# Altium PCB RX.PcbDoc
Units mil, origin at the board's own origin, x right, y up, seen from the top; angles counter-clockwise.
Board outline 2185.03 x 2115.03 mil, 2 copper layers (Top Layer, Bottom Layer); 9 components, 16 nets, 61 pads, 0 vias.
Unrouted connection lines stored in the file: 1.
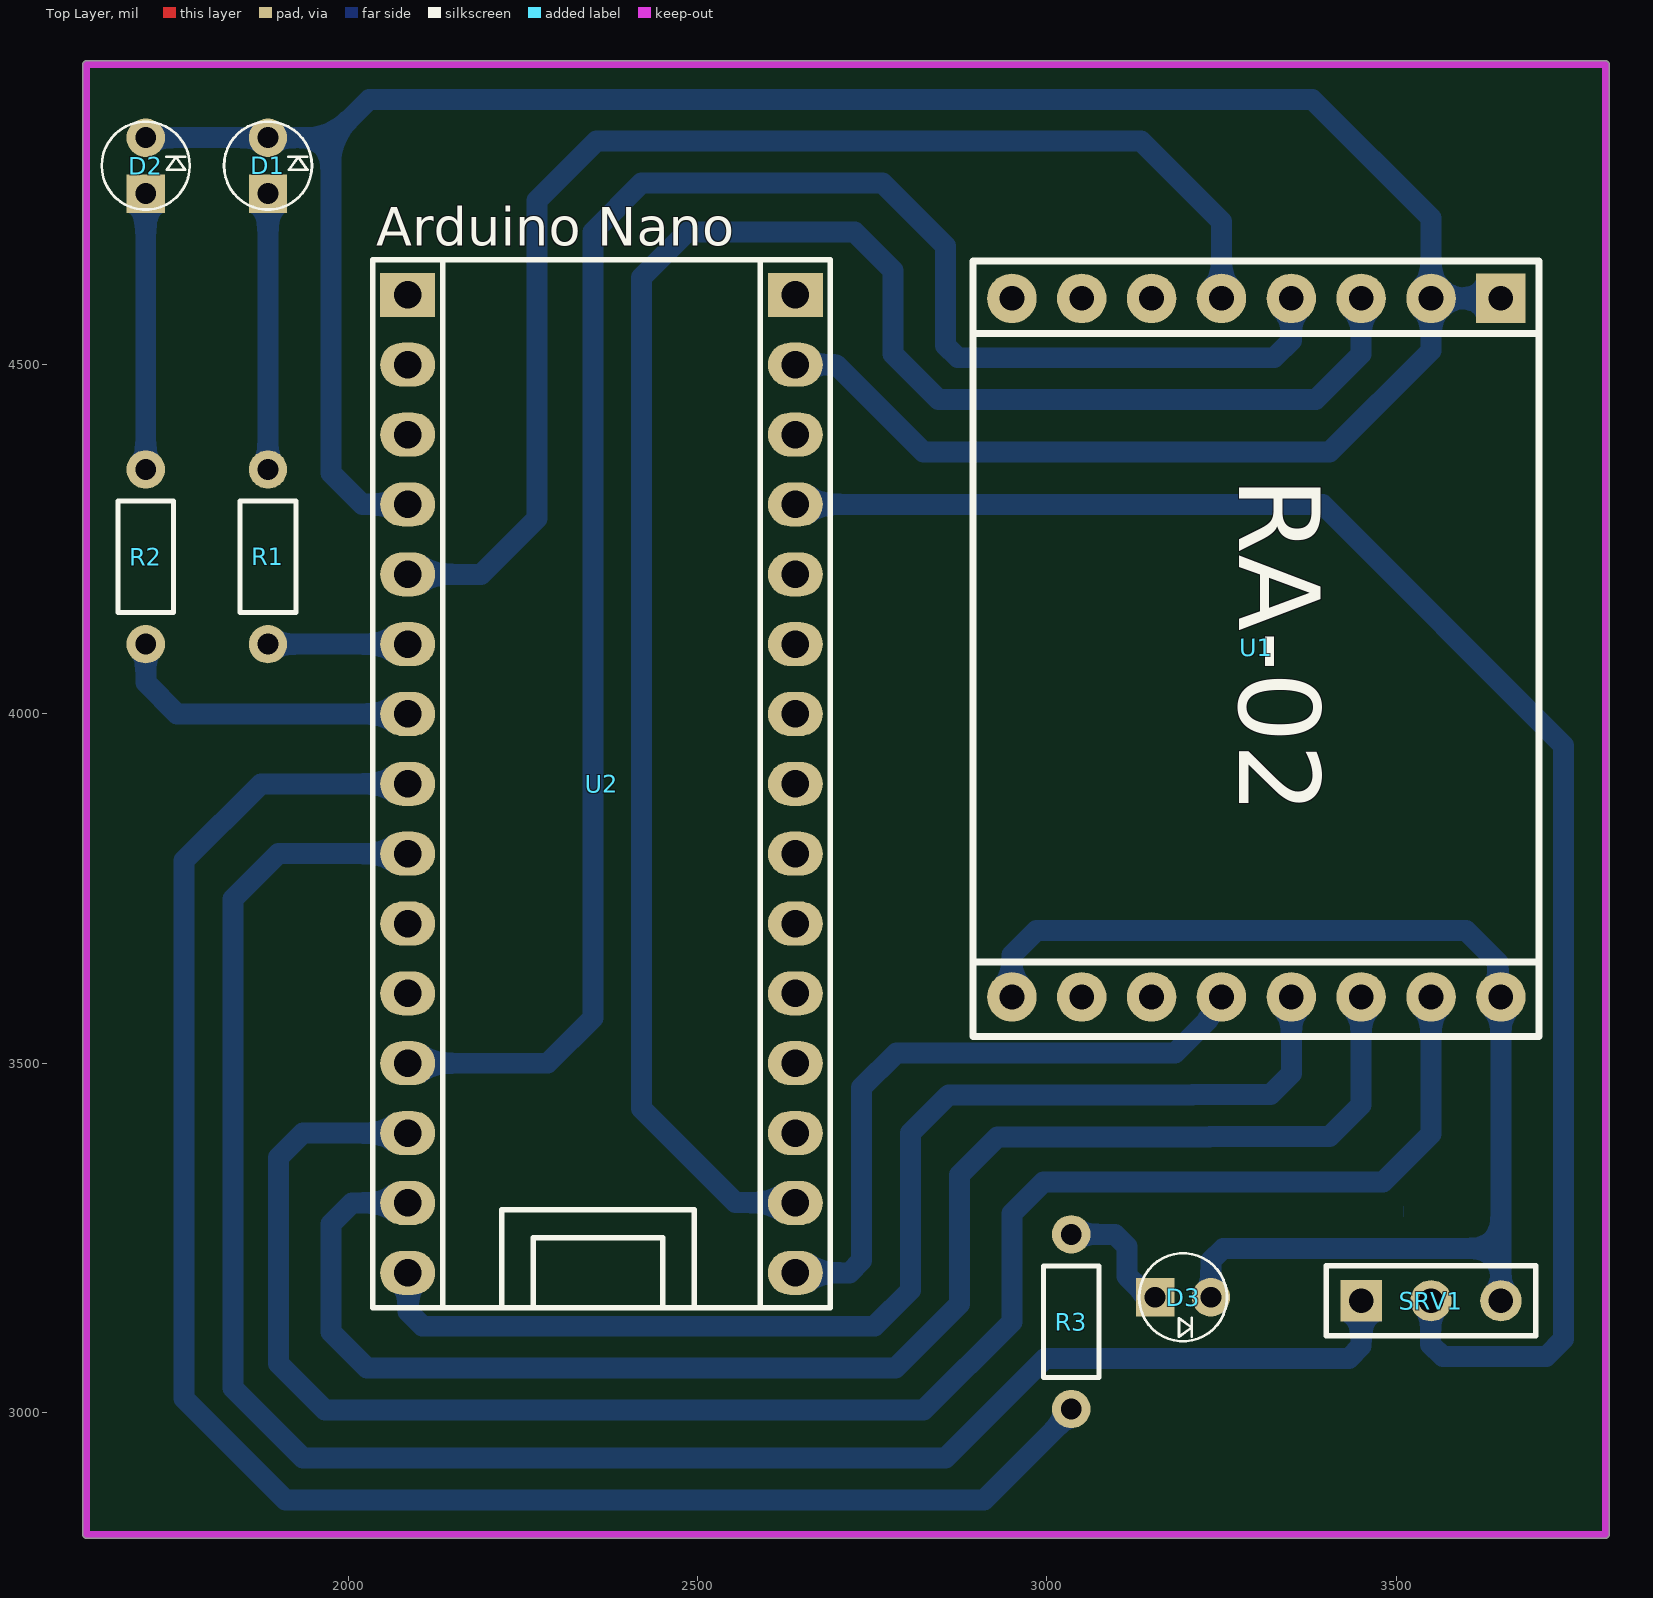
[diagram p0: Top Layer view]
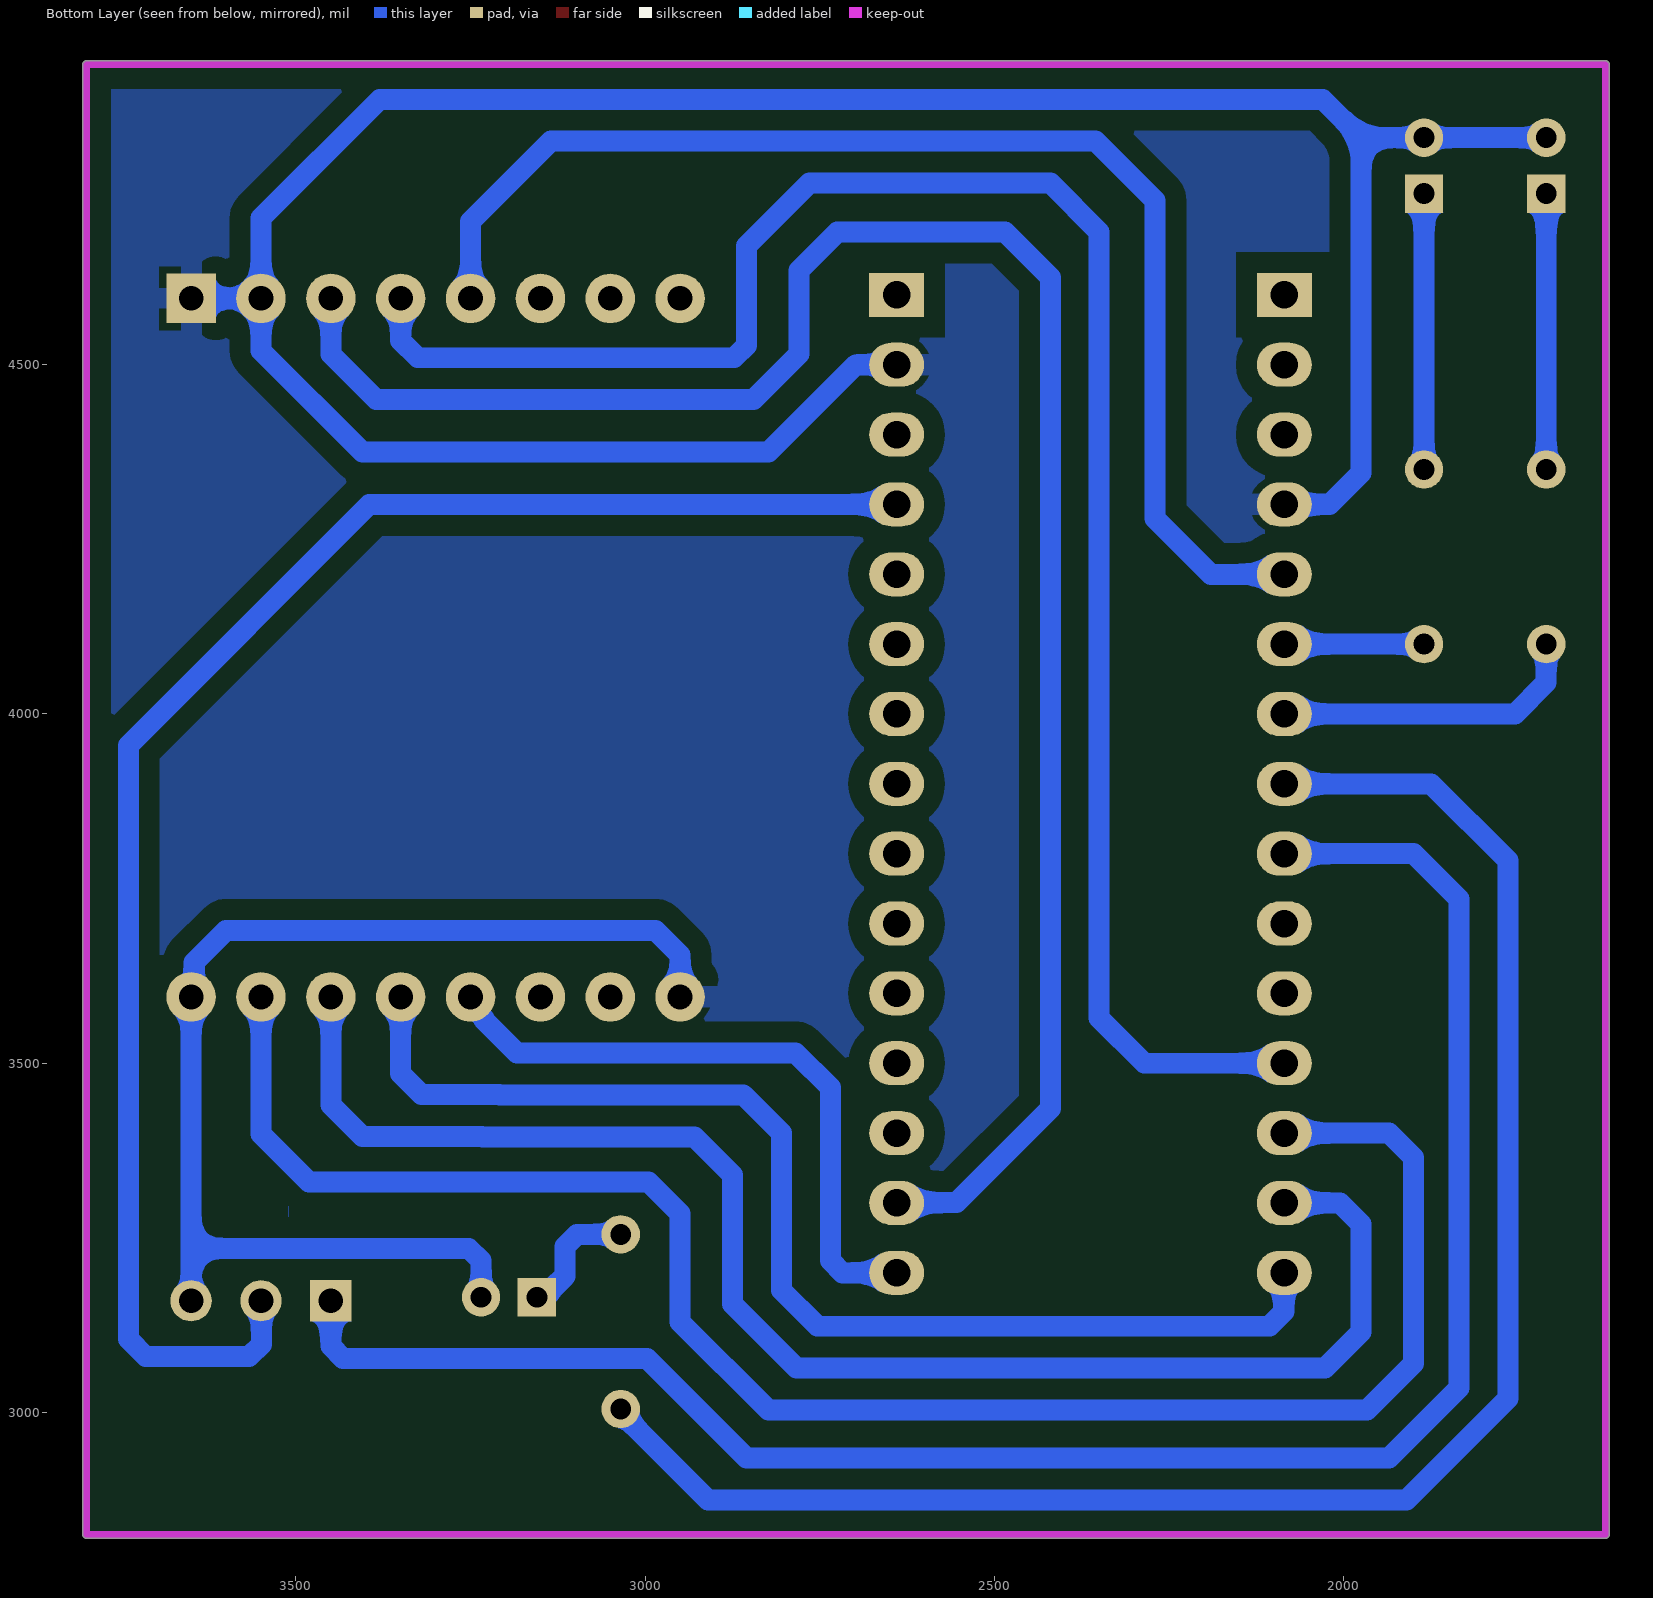
[diagram p1: Bottom Layer view, seen from below]
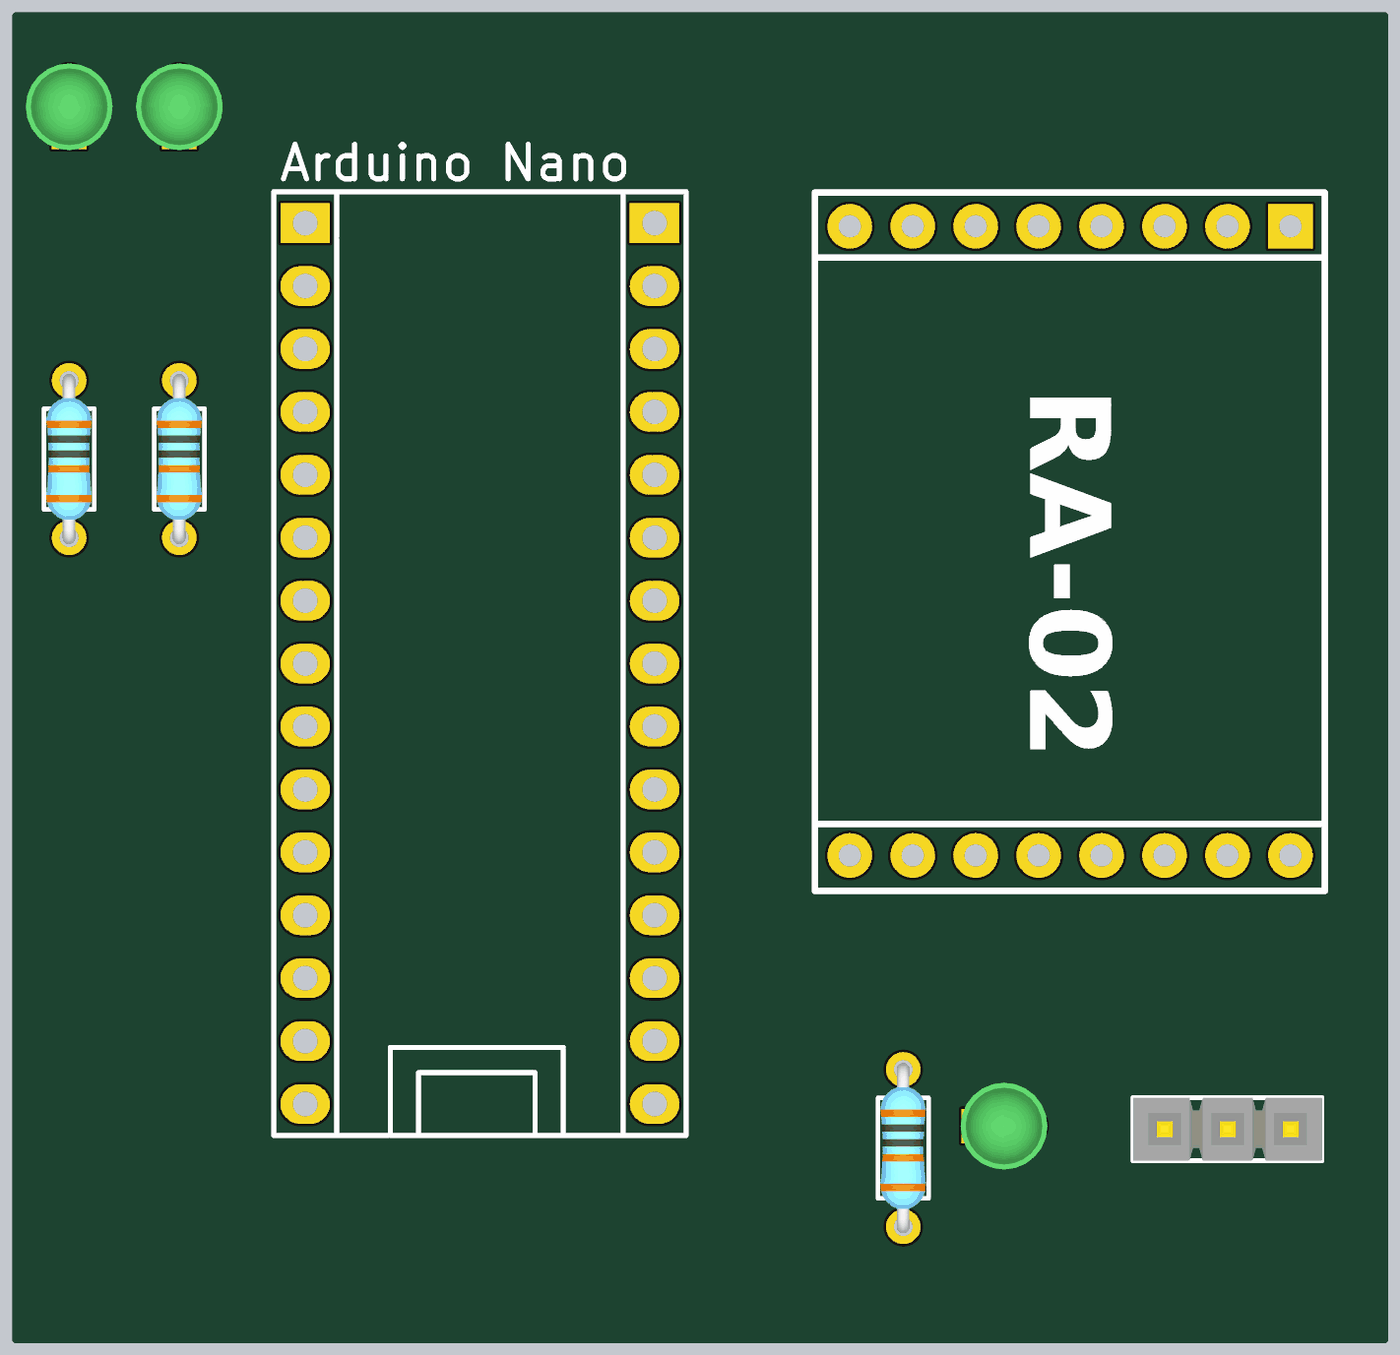
[diagram p2: 3D render of the assembled board from above, using the file's embedded part models]

## Layer stack, top to bottom
Top Solder: solder mask 0.4, Solder Resist, Dk 3.5
Top Layer: signal copper 1.4
Dielectric 1: dielectric 12.6, FR-4, Dk 4.8
Bottom Layer: signal copper 1.4
Bottom Solder: solder mask 0.4, Solder Resist, Dk 3.5

## Board outline
1625,2819.99 cw(c1625,2825) 1619.98,2825 1619.98,4930 cw(c1625,4930) 1625,4935.02 3800,4935.02 cw(c3800,4930) 3805.01,4930 3805.01,2825 cw(c3800,2825) 3800,2819.99

## Design rules (kind name [scope] priority, off if disabled: settings)
Clearance [All] p1: gap=30 ignorepadtopadclearanceinfootprint=FALSE except(10: THPad-THPad)
PolygonConnect [All] p1: connectstyle=Relief reliefconductorwidth=30 reliefentries=4 polygonreliefangle="90 Angle" airgapwidth=10
RoutingVias [All] p1: holewidth=28 width=50 viastyle="Through Hole" minholewidth=28 minwidth=50 maxholewidth=28 maxwidth=50
SilkToSolderMaskClearance [IsPad] p1: minsilkscreentomaskgap=0 clearancetoexposedcopper=TRUE
SolderMaskExpansion [All] p1: expansion=4 istentingtop=FALSE
Width [All] p1: maxlimit=100 minlimit=10 preferedwidth=30 minimp=50.000000 maximp=50.000000 favimp=50.000000
29 further rules are at their usual default settings.

## Components (designator, comment, footprint, x,y, rotation, side; value= is the part's Value field where it differs from the comment)
D1 "LED" LED3mm_GRN 1885,4785 r90 top
D2 "LED" LED3mm_GRN 1710,4785 r90 top
D3 "LED" LED3mm_GRN 3195,3165 r0 top
R1 "220R" RES-(1/4) 1885,4225 r270 top
R2 "220R" RES-(1/4) 1710,4225 r270 top
R3 "220R" RES-(1/4) 3035,3130 r270 top
SRV1 "Header 3" HDR1X3 3450,3160 r0 top
U1 "RA-02" RA-02 3650,4595 r270 top
U2 "Arduino Nano" Arduino_Nano328 2362.5,3900 r90 top

## Footprints (in the part's own frame and the unit in brackets; to place one, negate y for a bottom-side part, rotate by r counter-clockwise, add the part's x,y. Pads: shape width x height; smd on the part's side, far side on the other; paste and mask are expansions set on the pad)
Arduino_Nano328 [mm]
  rect 1.6x2 hole 1: 1(17.78,7.049) 30(17.78,-7.048)
  oval 1.6x2 hole 1: 2(15.24,7.049) 3(12.7,7.049) 4(10.16,7.048) 5(7.62,7.048) 6(5.08,7.048) 7(2.54,7.048) 8(0,7.048) 9(-2.54,7.048) 10(-5.08,7.048) 11(-7.62,7.048) 12(-10.16,7.048) 13(-12.7,7.048) 14(-15.24,7.048) 15(-17.78,7.048) 16(-17.78,-7.049) 17(-15.24,-7.049) 18(-12.7,-7.049) 19(-10.16,-7.048) 20(-7.62,-7.048) 21(-5.08,-7.048) 22(-2.54,-7.048) 23(0,-7.048) 24(2.54,-7.048) 25(5.08,-7.048) 26(7.62,-7.048) 27(10.16,-7.048) 28(12.7,-7.048) 29(15.24,-7.048)
  silkscreen extent -19.05,-8.32 19.05,8.32
HDR1X3 [mm] "Connector; Header; 3 Position"
  rect 1.5x1.5 hole 0.9: 1(0,0)
  round 1.5 hole 0.9: 2(2.54,0) 3(5.08,0)
  silkscreen extent -1.27,-1.27 6.35,1.27, body extent -1.26,-1.27 6.36,1.27, height 8.38
LED3mm_GRN [mil]
  rect 55x55 hole 30: 1(-40,0)
  round 55 hole 30: 2(40,0)
  silkscreen extent -63,-63 63,63, body extent -69,-69 69,69, height 154
RA-02 [mm]
  rect 1.8x1.8 hole 0.9: 1(0,0)
  round 1.8 hole 0.9: 2(0,-2.54) 3(0,-5.08) 4(0,-7.62) 5(0,-10.16) 6(0,-12.7) 7(0,-15.24) 8(0,-17.78) 9(25.4,-17.78) 10(25.4,-15.24) 11(25.4,-12.7) 12(25.4,-10.16) 13(25.4,-7.62) 14(25.4,-5.08) 15(25.4,-2.54) 16(25.4,0)
  silkscreen extent -1.36,-19.19 26.83,1.39
RES-(1/4) [mil]
  round 55 hole 30: 1(-125,0) 2(125,0)
  silkscreen extent -80,-40 80,40, body extent -135,-36 135,36, height 115

## Part data
D1 D2 D3: library part "LED 3MM", "Light Emitting Diode", Designer="Ali Hafizi"
R1 R2 R3: library part "RES DIP PACKAGE", "TOTAL DIP RESISTOR PACK", Designer="Ali Hafizi"
SRV1: "Header, 3-Pin", LatestRevisionDate=17-Jul-2002, LatestRevisionNote="Re-released for DXP Platform.", Publisher="Altium Limited"
U2: "Arduino Nano 328"

## Nets (pads, with @x,y where several pads share a name; then routed paths per layer and width w, separated by ;. In a path a pad name is that pad's centre, name@x,y a point inside that pad or via, vN(x,y) a via of type N, cw(c..) or ccw(c..) an arc to the next point about the centre after c; other vN are vias at no path point)
+3V3: U1.3 U2.17 | length 2799.4
  Bottom Layer w30: U2.17 2639.47,3300.53 2554.47,3300.53 2420,3435 2420,4625 2485,4690 2725,4690 2780,4635 2780,4515.15 2845.15,4450 3385,4450 3450,4515 U1.3
+5V: SRV1.2 U2.27 | length 2363.8
  Bottom Layer w30: U2.27 3395,4300 3740,3955 3740,3105 3715,3080 3567.01,3080 3549.44,3097.57 3549.44,3159.44 SRV1.2
D0: U1.5 U2.5 | length 1846
  Bottom Layer w30: U2.5 2190,4200 2270,4280 2270,4735 2355,4820 3135,4820 3250,4705 U1.5
D3: R1.2 U2.6 | length 200
  Bottom Layer w30: R1.2 U2.6
D4: R2.2 U2.7 | length 448.6
  Bottom Layer w30: R2.2 1710.22,4099.78 1710.22,4044.78 1755,4000 U2.7
D5: R3.2 U2.8 | length 2522.3
  Bottom Layer w30: U2.8 1875,3900 1765,3790 1765,3020.15 1910.15,2875 2910,2875 3035,3000 R3.2
D6: SRV1.1 U2.9 | length 2764.6
  Bottom Layer w30: U2.9 1900,3800 1835,3735 1835,3035 1935,2935 2855,2935 2997.5,3077.5 3432.43,3077.5 3450,3095.07 SRV1.1
GND: D1.2 D2.2 D3.2 SRV1.3 U1.1 U1.2 U1.9 U1.16 U2.4 U2.29 | length 5603.6
  Bottom Layer w30: D2.2 D1.2 1975,4825 ; U2.4 2020,4300 1975,4345 1975,4825 ; U2.29 2698.17,4500 2823.17,4375 3405,4375 3550,4520 U1.2 ; U1.9 2950,3655 2985,3690 3600,3690 3645.63,3644.37 3645.63,3599.37 U1.16 3650,3235 ; D3.2 3235,3217.43 3252.57,3235 3650,3235 ; SRV1.3 3650,3235 ; U1.1 U1.2 ; 1975,4825 2030,4880 3380,4880 3550,4710 U1.2
MISO: U1.13 U2.15 | length 1720.4
  Bottom Layer w30: U2.15 2085.53,3199.47 2085.53,3144.47 2106.5,3123.5 2753.5,3123.5 2805,3175 2805,3400 2859.57,3454.57 3208.17,3454.57 3208.6,3455 3320,3455 3350,3485 U1.13
MOSI: U1.14 U2.14 | length 2193.1
  Bottom Layer w30: U2.14 2005,3300 1975,3270 1975,3115 2026.5,3063.5 2783.5,3063.5 2875,3155 2875,3340 2929.57,3394.57 3233.02,3394.57 3233.46,3395 3405,3395 3450,3440 U1.14
NetD1_1: D1.1 R1.1 | length 395
  Bottom Layer w30: R1.1 D1.1
NetD2_1: D2.1 R2.1 | length 395
  Bottom Layer w30: R2.1 D2.1
NetD3_1: D3.1 R3.1 | length 182.1
  Bottom Layer w30: R3.1 3097.43,3255 3115,3237.43 3115,3195.07 3132.57,3177.5 3142.5,3177.5 D3.1
NSS: U1.15 U2.13 | length 2623
  Bottom Layer w30: U2.13 1935,3400 1900,3365 1900,3070 1966.5,3003.5 2823.65,3003.5 2950,3129.85 2950,3285 2995,3330 3481.36,3330 3550,3398.64 U1.15
RST: U1.4 U2.12 | length 2703.3
  Bottom Layer w30: U2.12 2285,3500 2350,3565 2350,4690 2420,4760 2765,4760 2855,4670 2855,4527.57 2872.57,4510 3325,4510 3350,4535 U1.4
SCK: U1.12 U2.16 | length 926.6
  Bottom Layer w30: U2.16 2717.43,3200 2735,3217.57 2735,3465 2784.57,3514.57 3183.32,3514.57 3230.43,3561.68 3230.43,3564.37 3250,3583.94 U1.12
pads on no net: U1.6 U1.7 U1.8 U1.10 U1.11 U2.1 U2.2 U2.3 U2.10 U2.11 U2.18 U2.19 U2.20 U2.21 U2.22 U2.23 U2.24 U2.25 U2.26 U2.28 U2.30

## Polygon pours and split planes (outlines as drawn)
GND on Bottom Layer "G_Bottom" (solid, remove dead copper, pour order 0): 1615,4940 3810,4940 3810,2815 1615,2815

## Keep-outs
Keep-Out Layer:
  lines w10: 1625,2825 1625,4930 3800,4930 3800,2825 1625,2825